# Altium PCB SLT_4U_PEE_V100.PcbDoc (part 4 of 7)
Units mm, origin at the board's own origin, x right, y up, seen from the top; angles counter-clockwise.
Board outline 180 x 80 mm, 6 copper layers (L1 TOP, L2 GND 1, L3 SIGNAL, L4 PWR, L5 GND 2, L6 BOT), stack 1.536 mm thick; 1123 components, 840 nets, 3813 pads, 351 vias.
Unrouted connection lines stored in the file: 2064.
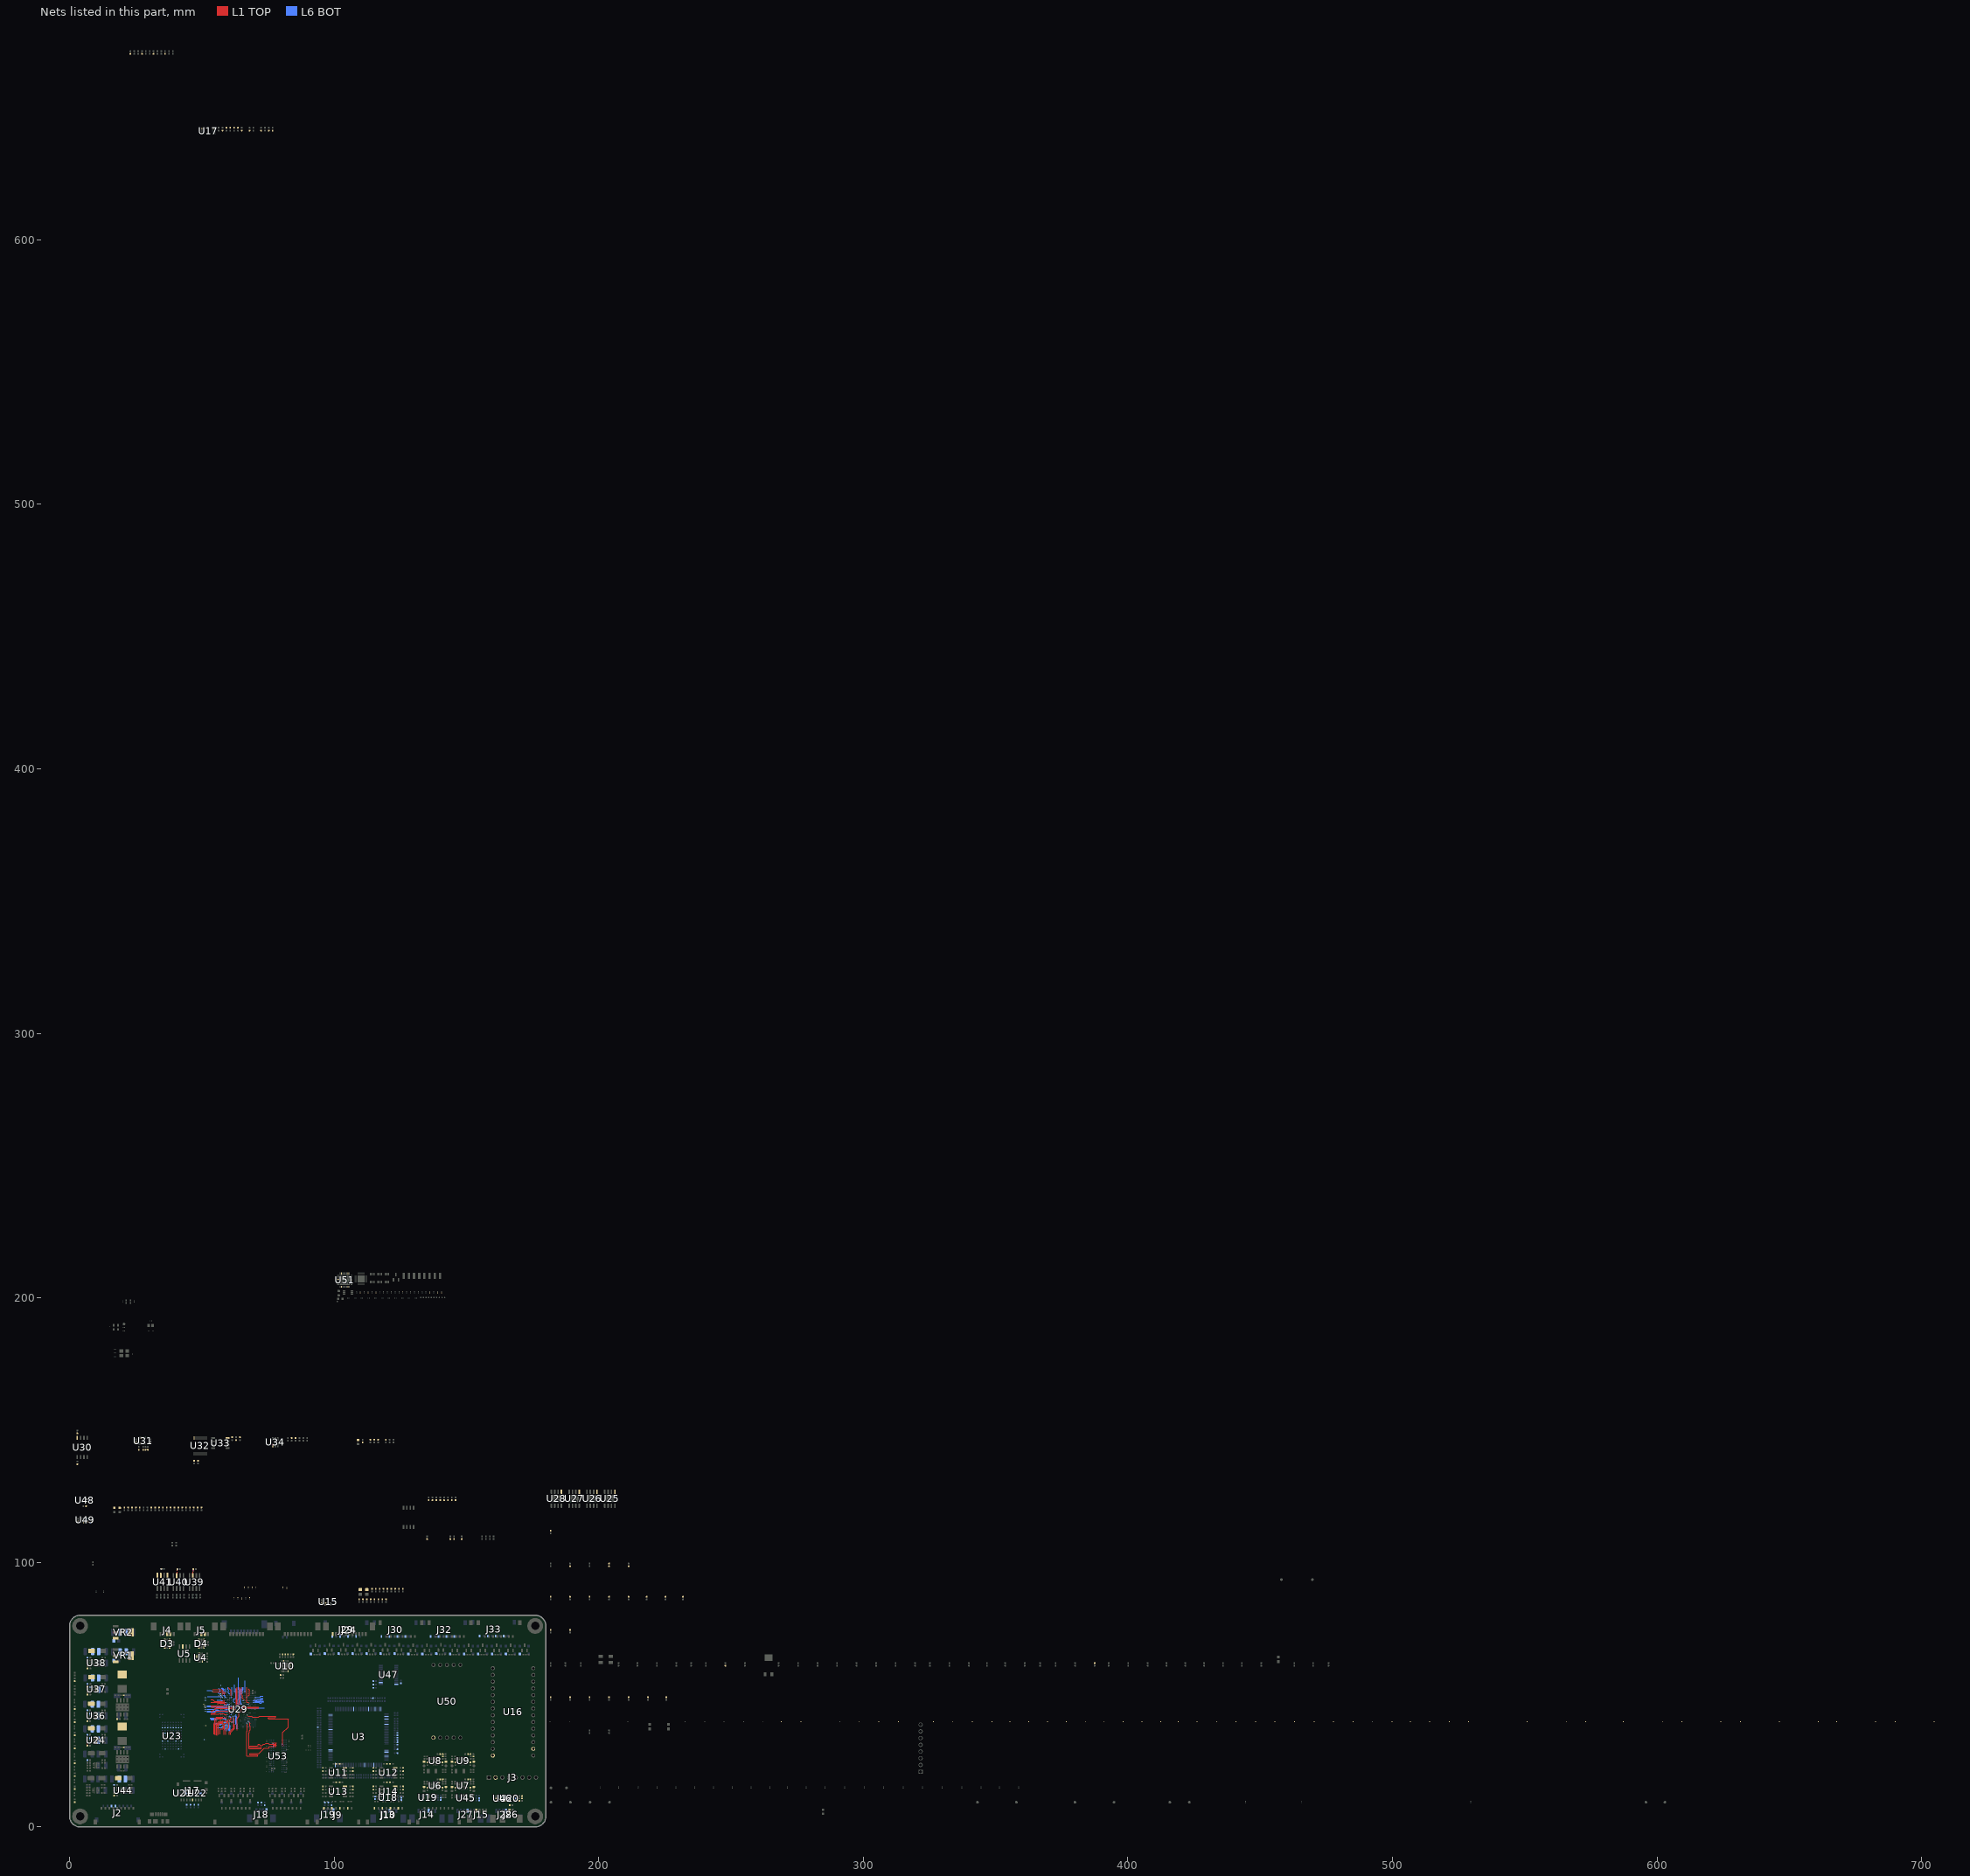
[diagram p4: the nets of this part, all layers, seen from the top]

## Via types
v1: diameter 0.35, hole 0.15, L1 TOP to L6 BOT, 281 vias
v2: diameter 0.4, hole 0.2, L1 TOP to L6 BOT, 61 vias
v3: diameter 0.4, hole 0.2, L1 TOP to L6 BOT, tented both sides, 9 vias

## Nets (pads, with @x,y where several pads share a name; then routed paths per layer and width w, separated by ;. In a path a pad name is that pad's centre, name@x,y a point inside that pad or via, vN(x,y) a via of type N, cw(c..) or ccw(c..) an arc to the next point about the centre after c; other vN are vias at no path point) (continued)
_PC15: R524.2 U29.H9 | length 6
  L6 BOT w0.1: U29.H9@64.962,46.412 64.637,46.737 64.637,51.862 64.962,52.187
_PD12: R517.2 U29.P12 | length 5.8
  L6 BOT w0.1: U29.P12@63.012,42.512 62.687,42.187 62.687,41.637 62.912,41.412 62.912,38.887 63.112,38.687 63.112,37.137 63.187,37.062
_PD13: R519.2 U29.H18 | length 5.9
  L1 TOP w0.1: 53.809,47.062 58.462,47.062 v1(58.787,46.737)
  L1 TOP w0.125: 53.518,47.062 53.809,47.062
  L6 BOT w0.1: v1(58.787,46.737) U29.H18@59.112,46.412
_PD14: R521.2 U29.C19 | length 7.6
  L1 TOP w0.125: v2(54.037,51.162) 57.637,51.162 58.137,50.662 v1(58.137,49.987)
  L6 BOT w0.1: v1(58.137,49.987) U29.C19@58.462,49.662
  L6 BOT w0.125: 52.037,51.537 53.662,51.537 v2(54.037,51.162)
_PD15: R523.2 U29.R12 | length 4.9
  L6 BOT w0.1: U29.R12@63.012,41.862 63.012,41.612 63.112,41.512 63.112,39.037 63.312,38.837 63.312,37.312 63.462,37.162
_PD16: R525.2 U29.D18 | length 7
  L1 TOP w0.125: 54.112,52.012 57.462,52.012 58.787,50.687 v1(58.787,49.987)
  L6 BOT w0.1: v1(58.787,49.987) 58.787,49.337 U29.D18@59.112,49.012
_PD17: R527.2 U29.G18 | length 6.2
  L1 TOP w0.1: 54.637,47.587 54.712,47.512 57.787,47.512 57.987,47.712 58.462,47.712 58.789,47.385 v1(58.789,47.356)
  L1 TOP w0.125: 53.518,48.162 54.062,48.162 54.637,47.587
  L6 BOT w0.1: v1(58.789,47.356) 58.804,47.356 59.097,47.062 U29.G18@59.112,47.062
_PD18: R528.2 U29.B19 | length 2.8
  L6 BOT w0.125: 57.262,52.612 58.137,51.737 58.137,50.637 U29.B19@58.462,50.312
_PD19: R529.2 U29.N11 | length 7.7
  L1 TOP w0.1: v1(63.987,43.487) 63.987,43.137 64.037,43.087 64.037,41.837
  L1 TOP w0.125: 63.287,36.587 63.287,41.087 64.037,41.837
  L6 BOT w0.1: U29.N11@63.662,43.162 v1(63.987,43.487)
_PD22: U29.A19 | length 1.9
  L6 BOT w0.125: 57.775,52.625 58.462,51.937 U29.A19@58.462,50.962
_PD23: U29.K12 | length 7.5
  L1 TOP w0.125: v1(62.662,45.426) 62.705,45.469 62.705,45.729 62.977,46 62.977,47.748 63.012,47.784 63.012,52.312
  L6 BOT w0.1: v1(62.662,45.426) 62.68,45.426 62.994,45.112 U29.K12@63.012,45.112
_PD25: U29.K10 | length 8
  L1 TOP w0.1: v1(63.987,45.437) 63.987,46.787 64.187,46.987 64.187,47.937 64.287,48.037
  L1 TOP w0.125: 64.162,52.832 64.162,52.062 64.287,51.937 64.287,48.037
  L6 BOT w0.1: v1(63.987,45.437) U29.K10@64.312,45.112
_PD28: R530.2 U29.J12 | length 7.2
  L1 TOP w0.125: 63.287,52.832 63.287,46.862 63.339,46.81 v1(63.339,46.131)
  L6 BOT w0.1: U29.J12@63.012,45.762 63.012,45.783 63.339,46.11 v1(63.339,46.131)
_PE2: R359.2 U29.A18 | length 1.4
  L6 BOT w0.1: U29.A18@59.112,50.962 59.112,52.337
_PE3: R362.2 U29.C15 | length 3.2
  L6 BOT w0.1: U29.C15@61.062,49.662 61.387,49.987 61.387,52.711
_PE4: R364.2 U29.D15 | length 4.5
  L1 TOP w0.125: 59.875,52.774 61.112,51.537 61.112,49.612 v1(61.387,49.337)
  L6 BOT w0.1: U29.D15@61.062,49.012 v1(61.387,49.337)
_PE5: R367.2 U29.B16 | length 2.7
  L6 BOT w0.1: 60.087,51.662 60.112,51.637 60.112,51.149 60.087,51.124 60.087,50.637 U29.B16@60.412,50.312
  L6 BOT w0.125: 59.812,52.711 59.812,51.937 60.087,51.662
_PE6: R370.2 U29.G13 | length 6
  L6 BOT w0.1: U29.G13@62.362,47.062 62.037,47.387 62.037,48.237 62.237,48.437 62.712,48.437 62.887,48.612 62.887,52.312
ADC_SWITCH: R79.1 U10.14 U10.15 U10.16 U10.17 U10.18 U10.19 U10.20 U10.21
ADC_TEMP1: C94.2 R143.2 R168.2
ADC_TEMP2: C98.2 R150.2 R174.2
ADC_TEMP3: C106.2 R73.1 R180.2
ADC_TEMP4: C110.2 R75.1 R186.2
ADC_TEMP5: C95.2 R89.2 R169.2
ADC_TEMP6: C101.2 R84.2 R175.2
ADC_TEMP7: C107.2 R77.1 R181.2
ADC_TEMP8: C113.2 R106.2 R187.2
BMP390_INT: R14.1 R290.2 U48.7
CANRX1: R82.2 U41.4
CANTX1: R87.2 U41.1
CONN_USB_1_N: D3.1 U4.14
CONN_USB_1_P: D3.3 U4.13
CONN_USB_1_R_N: D3.6 J4.3
CONN_USB_1_R_P: D3.4 J4.2
CONN_USB_2_N: D4.1 U4.12
CONN_USB_2_P: D4.3 U4.11
CONN_USB_2_R_N: D4.6 J5.3
CONN_USB_2_R_P: D4.4 J5.2
DDR_A0: U29.W6 U53.N3 | length 34
  L1 TOP w0.125: v1(67.237,38.937) 67.194,38.894 67.194,38.698 67.177,38.681 67.177,37.464 67.187,37.454 67.187,36.237 67.012,36.062 67.012,26.862 67.112,26.762 71.012,26.762 71.112,26.862 71.112,27.162 71.012,27.262 68.312,27.262 68.212,27.362 68.212,27.662 68.312,27.762 71.612,27.762 73.612,29.762 75.212,29.762 75.487,30.037 75.487,30.287 75.662,30.462 75.812,30.462 78.012,30.462 78.112,30.562 78.112,30.862 78.012,30.962 76.762,30.962 v1(76.662,30.862)
  L6 BOT w0.125: U29.W6@66.912,39.262 v1(67.237,38.937) ; v1(76.662,30.862) U53.N3@77.062,30.462
DDR_A1: U29.P6 U53.P7 | length 34.1
  L1 TOP w0.1: v1(67.214,42.181) 67.243,42.181 67.562,41.862
  L1 TOP w0.125: 67.562,41.862 67.581,41.843 68.15,41.843 68.206,41.9 68.775,41.9 69.112,41.562 71.512,41.562 71.812,41.862 77.812,41.862 77.912,41.762 77.912,41.462 77.812,41.362 75.212,41.362 75.112,41.262 75.112,40.962 75.212,40.862 82.512,40.862 82.612,40.762 82.612,37.762 80.512,35.662 80.512,31.012 v1(80.662,30.862)
  L6 BOT w0.125: U29.P6@66.912,42.512 v1@67.237,42.187 ; U53.P7@80.262,31.262 v1(80.662,30.862)
DDR_A2: U29.V5 U53.P3 | length 34.1
  L1 TOP w0.125: v1(67.887,39.587) 68.193,39.282 68.193,39.112 68.168,39.087 68.168,38.055 68.237,37.985 68.237,36.687 68.012,36.462 68.012,35.762 67.812,35.562 67.812,29.662 67.912,29.562 72.312,29.562 72.412,29.662 72.412,29.962 72.312,30.062 68.312,30.062 68.212,30.162 68.212,30.462 68.312,30.562 71.012,30.562 71.212,30.762 71.212,31.062 71.412,31.262 71.612,31.262 72.112,30.762 72.812,30.762 73.312,31.262 73.812,31.262 74.187,31.637 75.062,31.637 75.437,31.262 78.012,31.262 78.112,31.362 78.112,31.662 78.012,31.762 76.762,31.762 v1(76.662,31.662)
  L6 BOT w0.125: U29.V5@67.562,39.912 v1(67.887,39.587) ; v1(76.662,31.662) 76.987,31.662 77.062,31.587 U53.P3@77.062,31.262